# Altium PCB CAN-UART.PcbDoc
Units mm, origin at the board's own origin, x right, y up, seen from the top; angles counter-clockwise.
Board outline 40 x 40 mm, 4 copper layers (Top Layer, Internal Plane 1, Internal Plane 2, Bottom Layer), stack 0.462 mm thick; 12 components, 10 nets, 41 pads, 16 vias.
Unrouted connection lines stored in the file: 21.
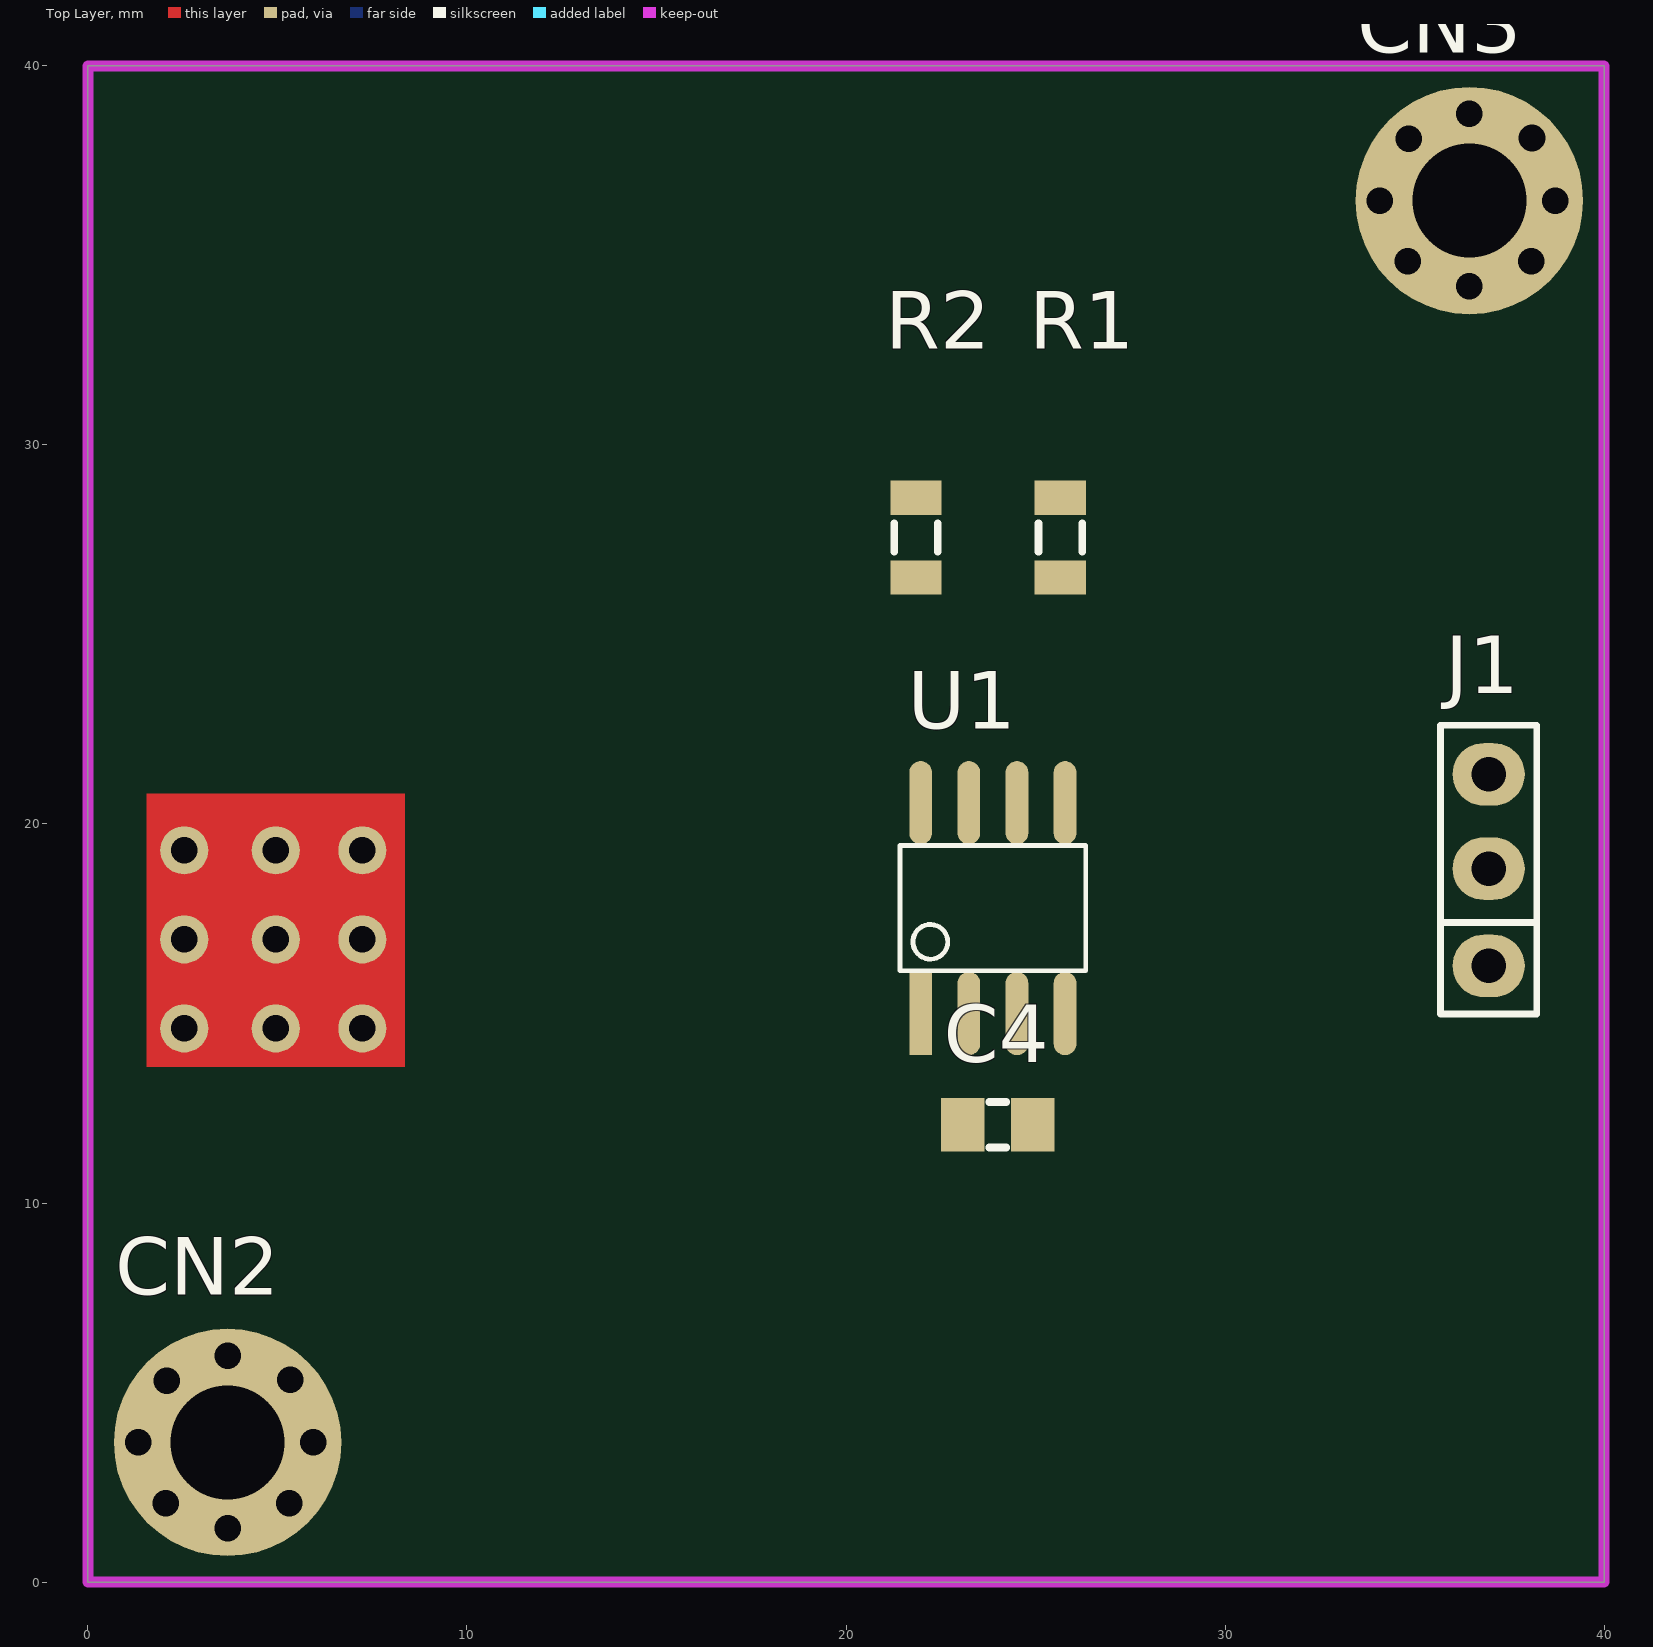
[diagram p0: Top Layer view]
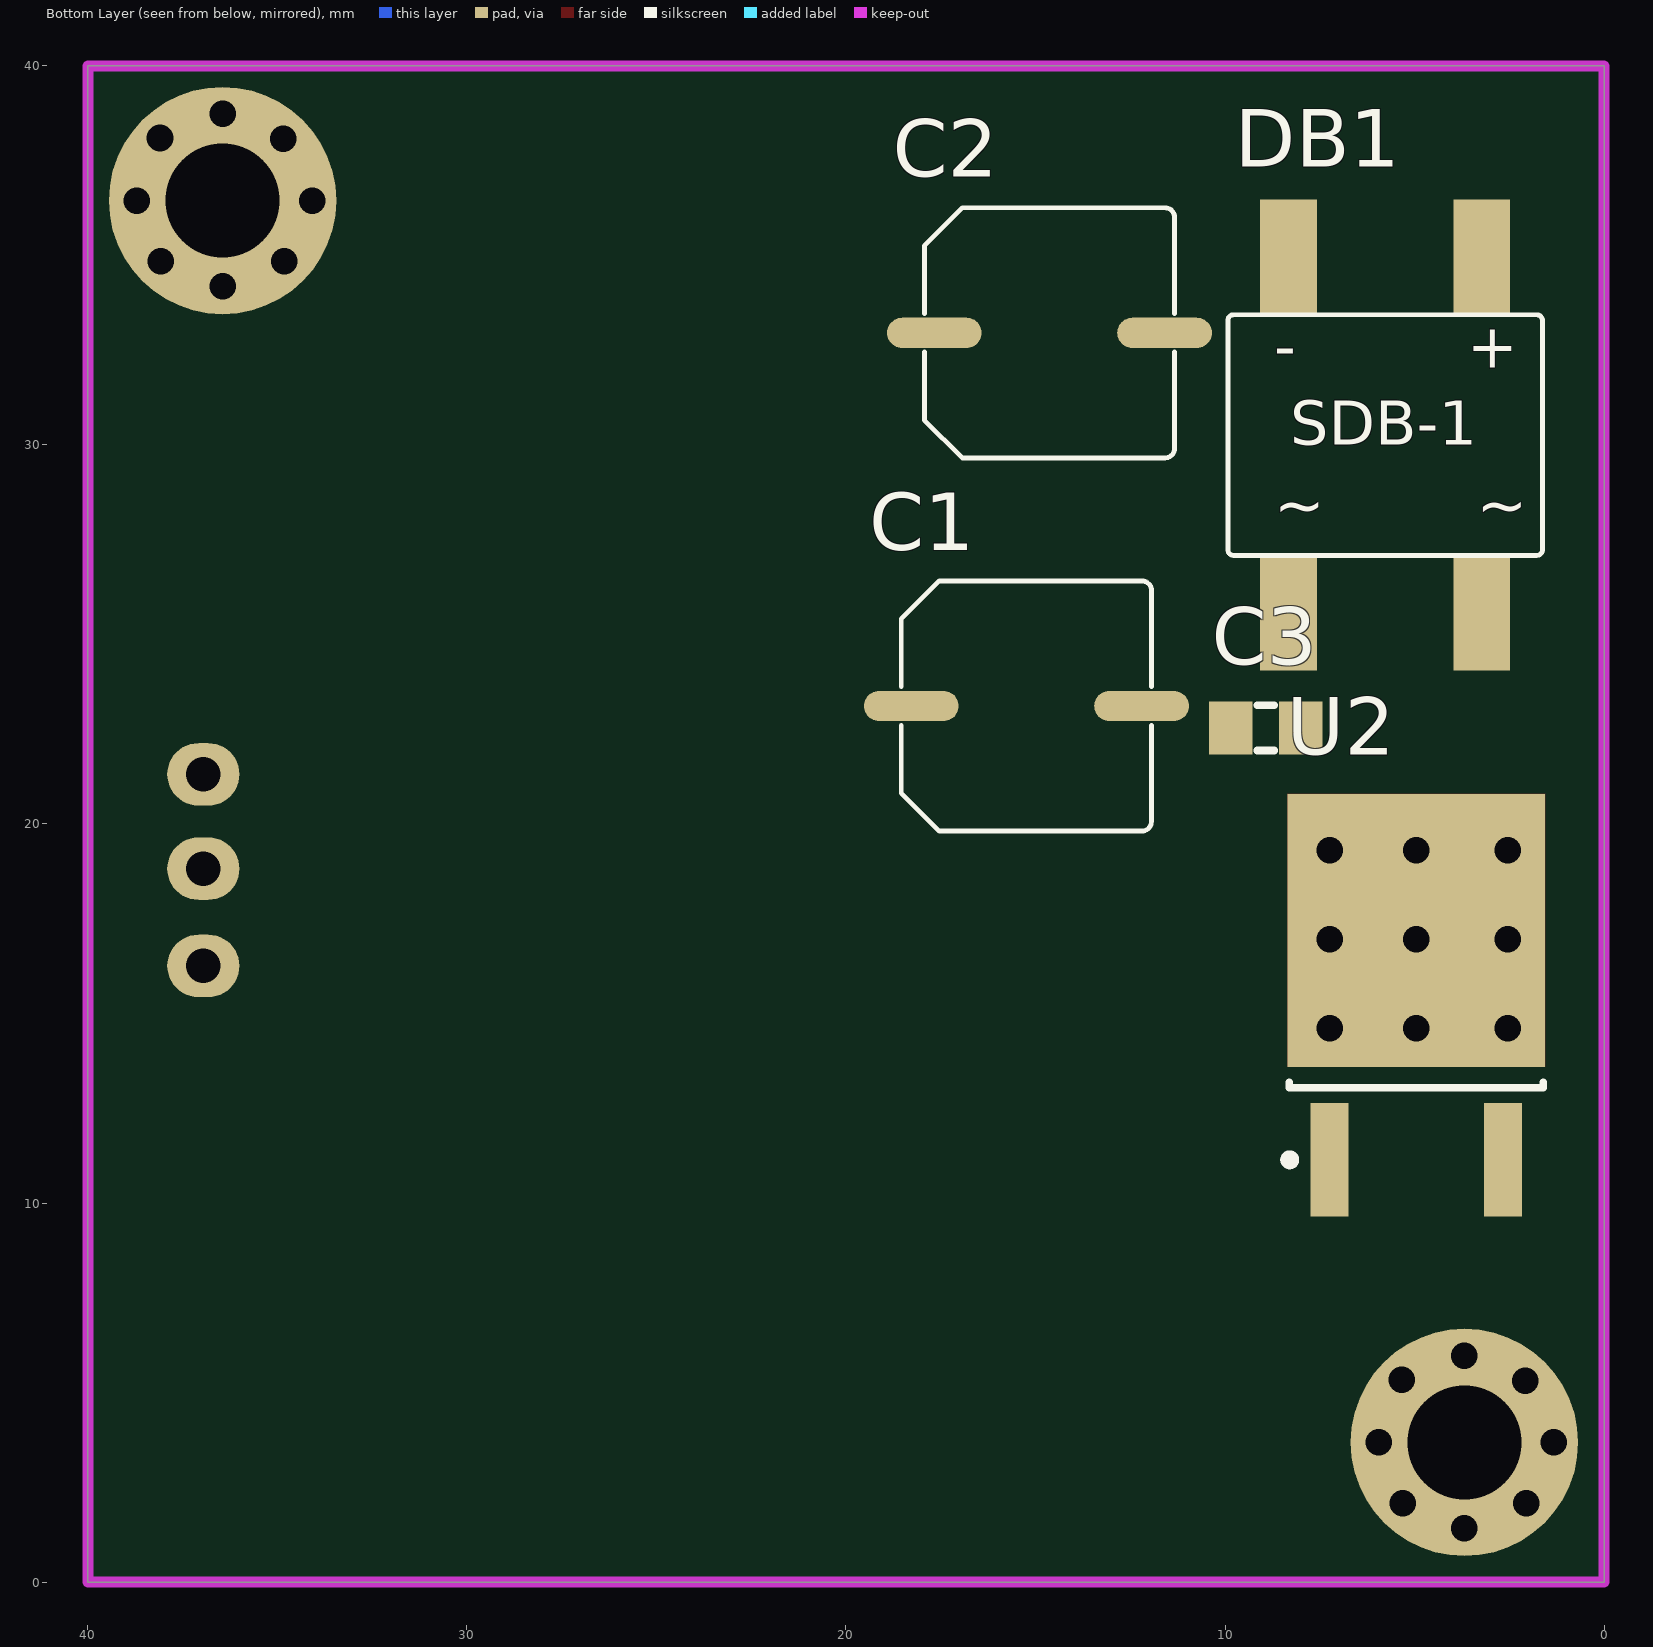
[diagram p1: Bottom Layer view, seen from below]
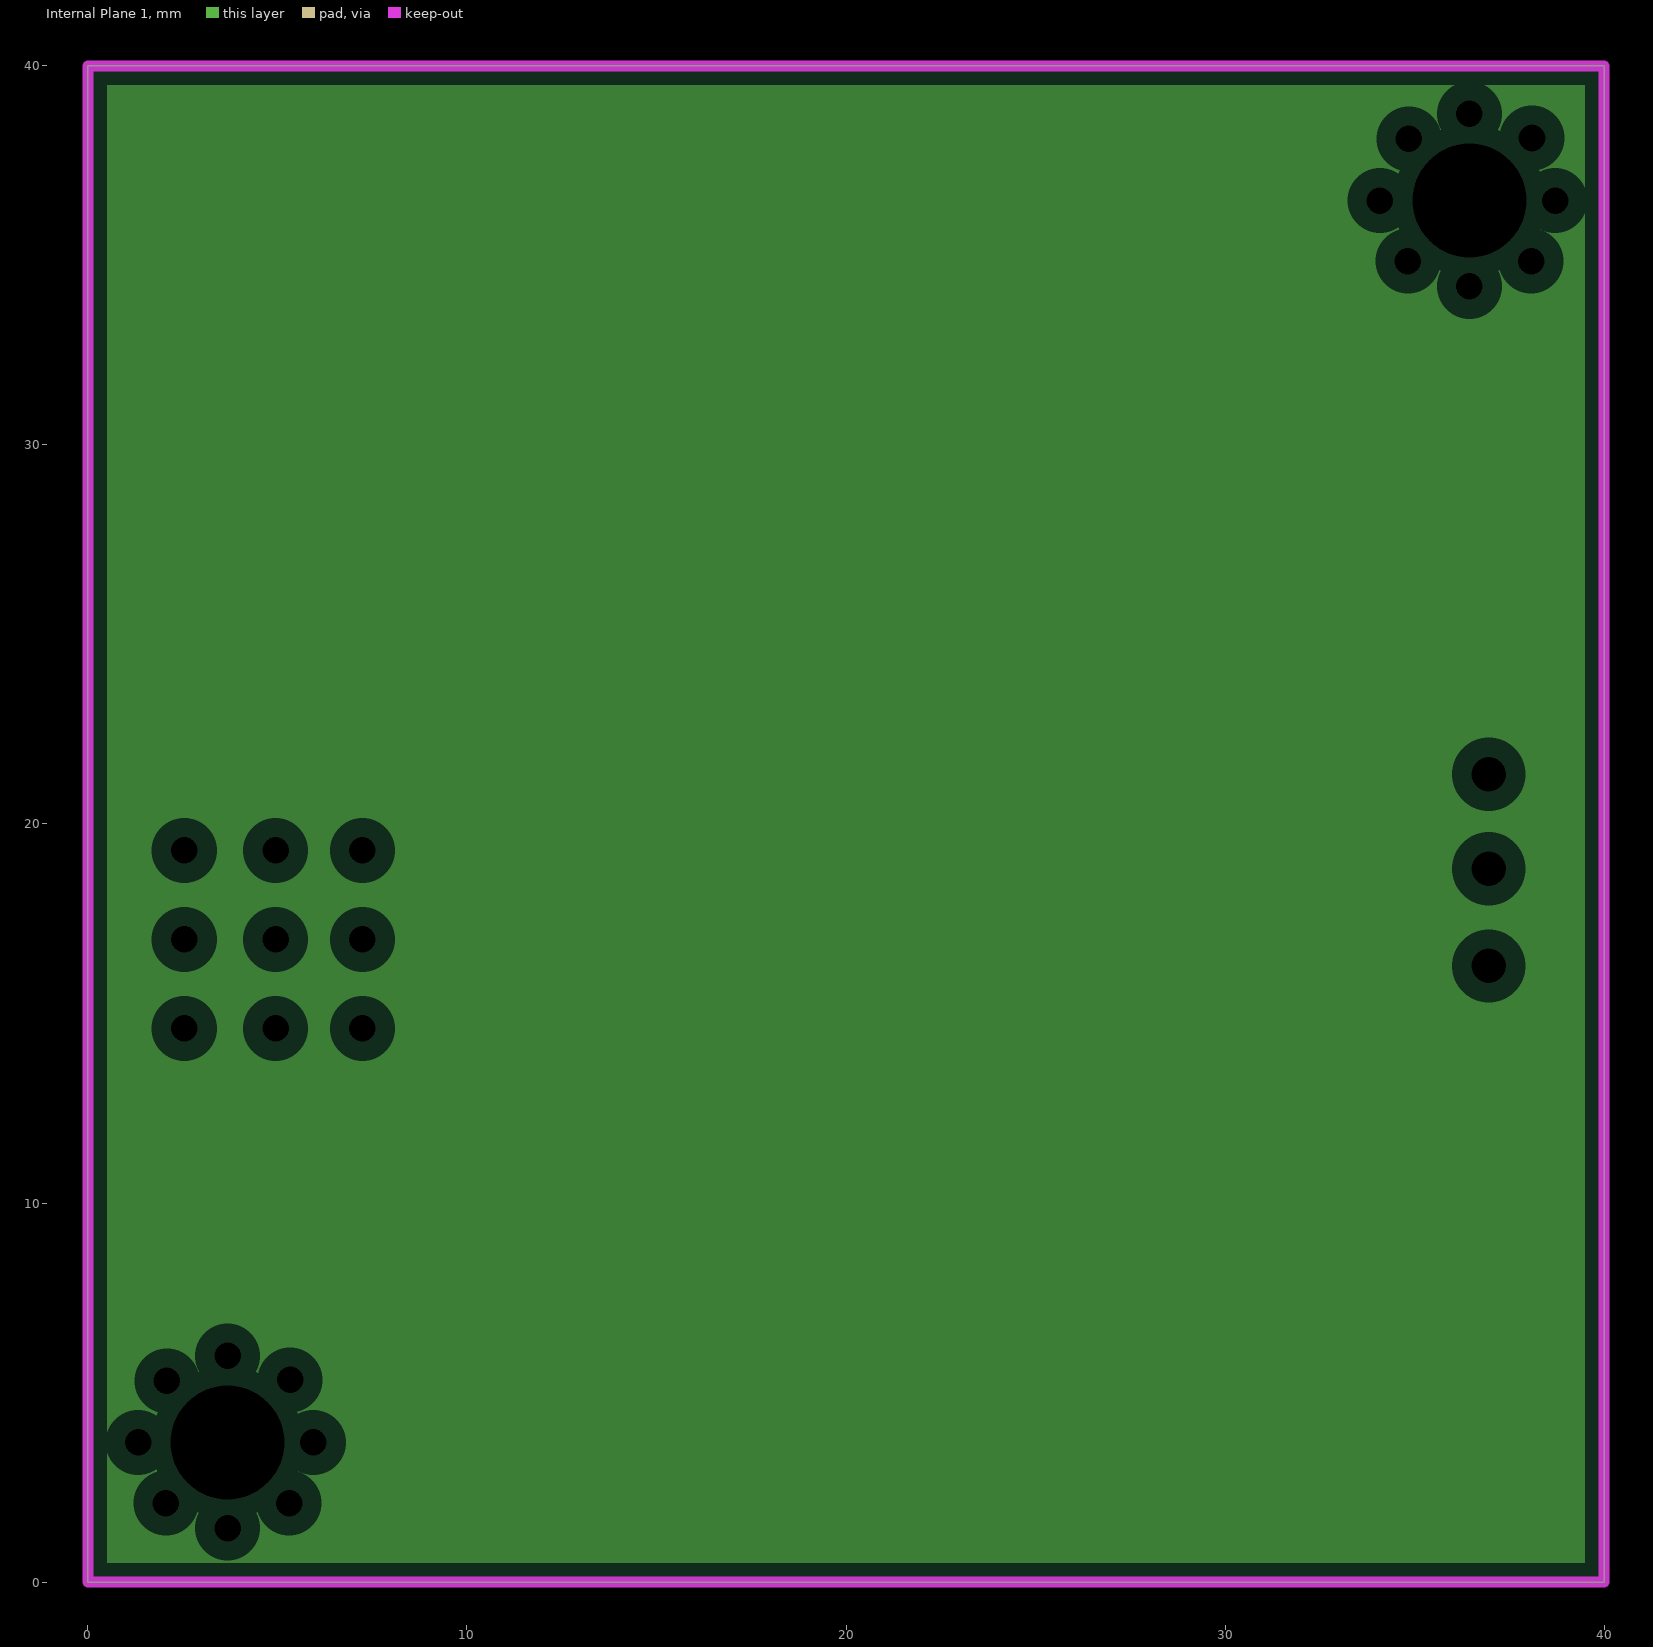
[diagram p2: Internal Plane 1, clearances drawn from the general rule]
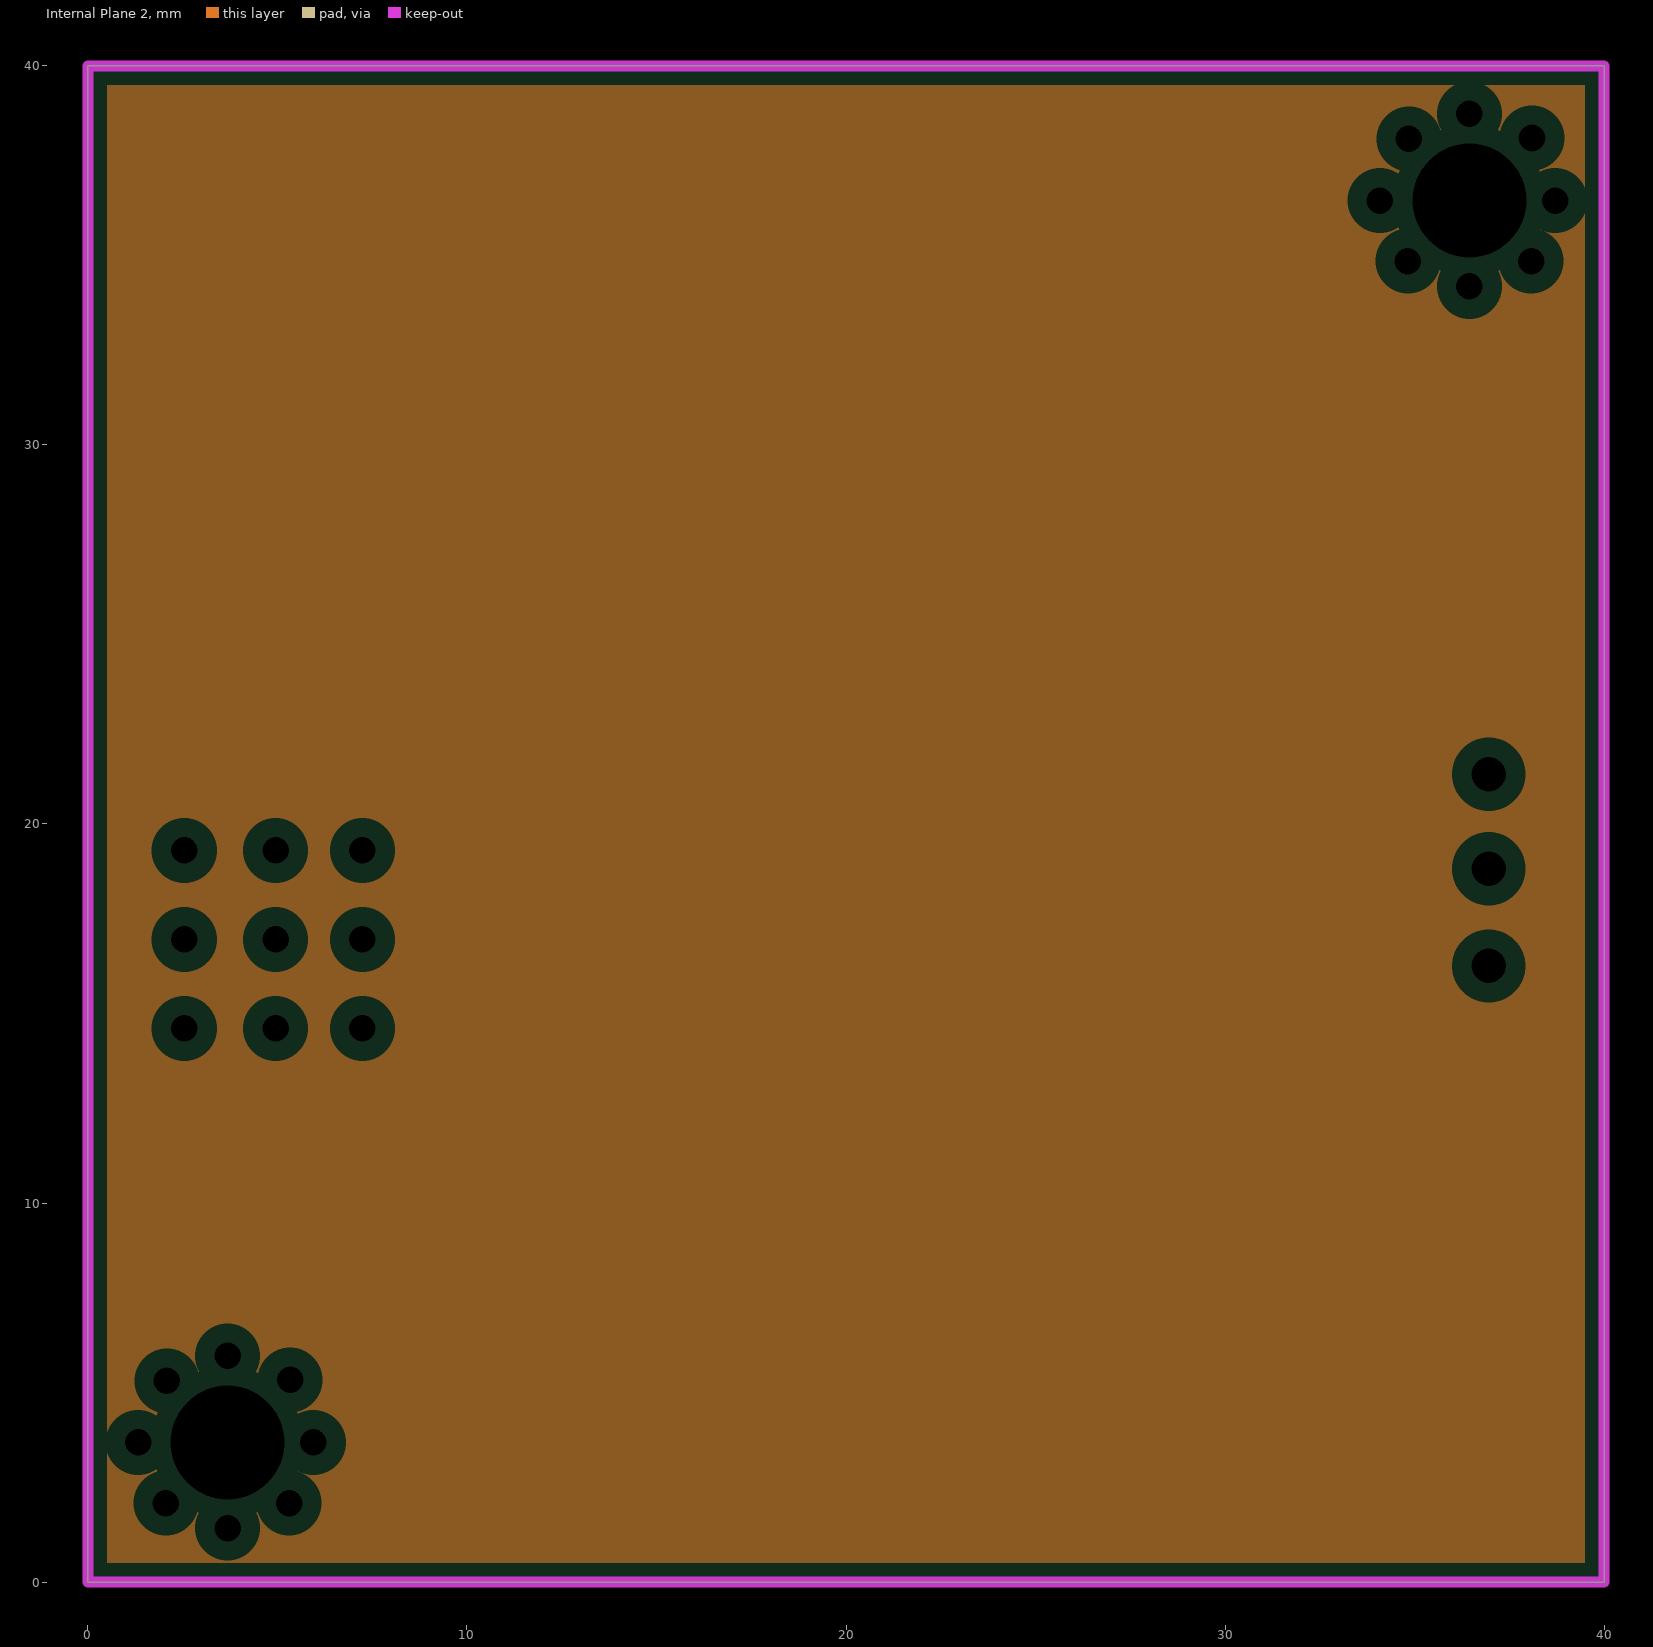
[diagram p3: Internal Plane 2, clearances drawn from the general rule]

## Layer stack, top to bottom
Top Solder: solder mask 0.0102, Solder Resist, Dk 3.5
Top Layer: signal copper 0.0356
Internal Plane 1: plane copper 0.0356
Internal Plane 2: plane copper 0.0356
Dielectric 1: dielectric 0.32, FR-4, Dk 4.8
Bottom Layer: signal copper 0.0356
Bottom Solder: solder mask 0.0102, Solder Resist, Dk 3.5

## Board outline
0,0 0,40 40,40 40,0

## Design rules (kind name [scope] priority, off if disabled: settings)
Clearance [All] p1: gap=0.2
PlaneClearance [All] p1: clearance=0.508
PlaneConnect [All] p1: planeconnectstyle=Relief reliefexpansion=0.508 reliefentries=4 reliefconductorwidth=0.254 reliefairgap=0.254
PolygonConnect [All] p1: connectstyle=Relief reliefconductorwidth=0.254 reliefentries=4 polygonreliefangle="90 Angle" airgapwidth=0.254
RoutingVias [All] p1: holewidth=0.7 width=1 viastyle="Through Hole" minholewidth=0.7 minwidth=1 maxholewidth=0.7 maxwidth=1
SolderMaskExpansion [All] p1: expansion=0.102
Width [All] p1: maxlimit=0.2 minlimit=0.2 preferedwidth=0.2
28 further rules are at their usual default settings.

## Components (designator, comment, footprint, x,y, rotation, side; value= is the part's Value field where it differs from the comment)
C1 "470uF" C-ALU-D6.5 15.24,23.114 r90 bottom
C2 "470uF" C-ALU-D6.5 14.631,32.958 r90 bottom
C3 "104" C-0805 8.921,22.539 r180 bottom
C4 "104" C-0805 24.003,12.065 r0 top
CN2 "VIN1" M3 3.683,3.683 r0 top
CN3 "VIN2" M3 36.449,36.449 r0 top
DB1 "Diode Brideg" D-DB-1A-SMD 5.774,30.261 r180 bottom
J1 "TTL" JP3 36.957,18.796 r90 top
R1 "120" R-0805 25.654,27.559 r90 top
R2 "10K" R-0805 21.844,27.559 r90 top
U1 "MCP2551" SOIC-8 23.876,17.78 r90 top
U2 "ASM1117" TO-252 4.953,15.24 r90 bottom

## Footprints (in the part's own frame and the unit in brackets; to place one, negate y for a bottom-side part, rotate by r counter-clockwise, add the part's x,y. Pads: shape width x height; smd on the part's side, far side on the other; paste and mask are expansions set on the pad)
C-0805 [mm] "Chip Capacitor, 2-Leads, Body 2.0x1.3mm, IPC Medium Density"
  rect 1.15x1.4 smd: 1(-0.925,0) 2(0.925,0)
  silkscreen extent -0.22,-0.6 0.23,0.6, body extent -1,-0.63 1,0.62, height 0.5
C-ALU-D6.5 [mm] "6.3x5.4mm"
  oval 0.8x2.5 smd: 1(0,3.038) 2(0,-3.038)
  silkscreen extent -3.3,-3.3 3.3,3.3, body extent -3.3,-3.8 3.3,3.8, height 6.25
D-DB-1A-SMD [mm] "DB106S"
  rect 1.5x3 smd: 1(-2.55,-4.713) 2(2.55,-4.713) 3(2.55,4.713) 4(-2.55,4.713)
  silkscreen extent -4.15,-3.18 4.15,3.18, body extent -4.15,-4.95 4.15,4.95, height 3.35
JP3 [mil] "Jumper 3"
  oval 65x75 hole 36: 1(-100,0) 2(1,0) 3(99,0)
  silkscreen extent -150,-50 150,50, body extent -150,-60 150,55, height 355
M3 [mm]
  round 6 hole 3: 1(0,0)
R-0805 [mm] "Chip Resistor, 2-Leads, Body 2.0x1.3mm, IPC Medium Density"
  rect 0.9x1.35 smd: 1(-1.05,0) 2(1.05,0)
  silkscreen extent -0.38,-0.58 0.38,0.58, body extent -1,-0.63 1,0.63, height 0.5
SOIC-8 [mm] "SOIC, 8-Leads, Body 4.9x3.9mm (max), Pitch 1.27mm, IPC Medium Density"
  rect 2.2x0.6 smd: 1(-2.781,1.905)
  oval 2.2x0.6 smd: 2(-2.781,0.635) 3(-2.781,-0.635) 4(-2.781,-1.905) 5(2.781,-1.905) 6(2.781,-0.635) 7(2.781,0.635) 8(2.781,1.905)
  silkscreen extent -1.65,-2.45 1.65,2.45, body extent -3.4,-2.5 3.4,2.5, height 1.75
TO-252 [mm] "AMS1117"
  rect 3x1 smd: 1(-4.1,2.29) 3(-4.1,-2.29)
  round 1.27 hole 0.7: 2(-0.635,-2.413) 2(-0.635,0) 2(-0.635,2.286) 2(1.714,-2.413) 2(1.714,0) 2(1.714,2.286) 2(4.064,-2.413) 2(4.064,0) 2(4.064,2.286)
  rect 7.2x6.8 smd: 2(1.95,0)
  Bottom Layer region: -1.651,3.404 5.563,3.404 5.563,-3.404 -1.626,-3.404 -1.651,-3.404 -1.651,-3.378
  silkscreen extent -4.22,-3.35 -2.05,3.47, body extent -4.55,-3.37 5.36,3.38, height 2.39

## Part data
C1 C2: library part CP1, "Cap P  0,1uF < 22uF , 16 - 50V"
C3 C4: library part CN
CN2 CN3: library part COCDONGM3
DB1: library part DB, "Convert AC to DC voltage, 4 pin"
J1: library part JP3, "Jumper 3"
R1 R2: library part R, "Resistor 1/4W"

## Via types
v1: diameter 1, hole 0.7, Top Layer to Bottom Layer, 16 vias

## Nets (pads, with @x,y where several pads share a name; then routed paths per layer and width w, separated by ;. In a path a pad name is that pad's centre, name@x,y a point inside that pad or via, vN(x,y) a via of type N, cw(c..) or ccw(c..) an arc to the next point about the centre after c; other vN are vias at no path point)
+5V: C2.1 C4.2 U1.3 U2.2
+12V: C1.1 C3.2 DB1.3 U2.3
CANH: R1.1 U1.7
CANL: R1.2 U1.6
GND: C1.2 C2.2 C3.1 C4.1 DB1.4 J1.1 R2.1 U1.2 U2.1
NetCN2_1: CN2.1 DB1.2
  other v1: 3.683,1.422 2.057,2.083 5.309,2.083 1.321,3.683 5.944,3.683 2.083,5.309 5.334,5.334 3.683,5.969
NetCN3_1: CN3.1 DB1.1
  other v1: 36.449,34.188 34.823,34.849 38.075,34.849 34.087,36.449 38.71,36.449 34.849,38.075 38.1,38.1 36.449,38.735
NetR2_2: R2.2 U1.8
RXD: J1.3 U1.4
TXD: J1.2 U1.1
pads on no net: U1.5

## Keep-outs
Keep-Out Layer:
  the board outline again, w0.3

## Text inside footprints (layer, text, board x,y; h text height)
DB1: Bottom Overlay "SDB-1" at 8.282,29.621 h2; Bottom Overlay "-         +" at 8.695,31.658 h2; Bottom Overlay "~        ~" at 8.695,27.467 h2